# EAGLE board 24-SMD-adapter (EAGLE 6.3)
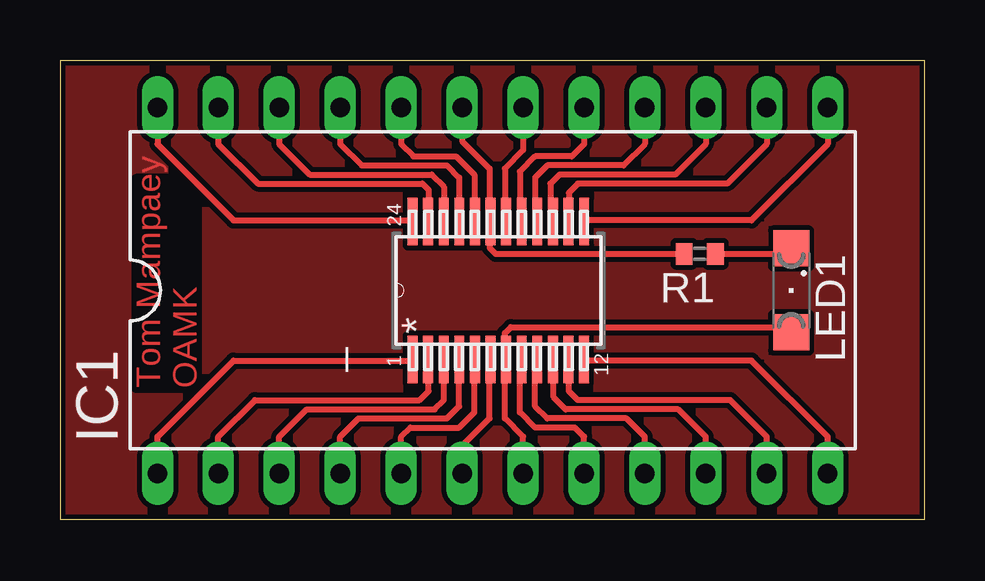
[diagram p0: board, top side]

Size 36.05 x 19.1 mm. Coordinates in mm from the lower left corner, seen from the top.
Outline: 0,0 36.05,0 36.05,19.1 0,19.1 0,0
Copper layers (1*16): Top 0.035mm / dielectric 1.5mm / Bottom 0.035mm
Design rules "default *": minimum track width 10mil, minimum drill 24mil, track to track 8mil, track to pad 8mil, pad to pad 8mil, via to via 8mil, smd to smd 8mil, copper to edge 8mil, drill to drill 8mil, minimum pad ring 10mil, minimum via ring 8mil, stop-mask expansion 4mil, vias tented up to drill 0mil, thermal gap 10mil

## Footprints (pad centres in the part's own frame; a part is rotated, then mirrored left to right if it is on the bottom)
SOT361_1_M = smd 1.981 x 0.406: 1 -2.87,3.336; 2 -2.87,2.686; 3 -2.87,2.036; 4 -2.87,1.386; 5 -2.87,0.736; 6 -2.87,0.086; 7 -2.87,-0.564; 8 -2.87,-1.214; 9 -2.87,-1.864; 10 -2.87,-2.514; 11 -2.87,-3.164; 12 -2.87,-3.814; 13 2.87,-3.816; 14 2.87,-3.166; 15 2.87,-2.514; 16 2.87,-1.864; 17 2.87,-1.214; 18 2.87,-0.564; 19 2.87,0.086; 20 2.87,0.736; 21 2.87,1.386; 22 2.87,2.036; 23 2.87,2.686; 24 2.87,3.336
DIL24-6 = drill 0.813 long: 1 -13.97,-7.62; 2 -11.43,-7.62; 3 -8.89,-7.62; 4 -6.35,-7.62; 5 -3.81,-7.62; 6 -1.27,-7.62; 7 1.27,-7.62; 8 3.81,-7.62; 9 6.35,-7.62; 10 8.89,-7.62; 11 11.43,-7.62; 12 13.97,-7.62; 13 13.97,7.62; 14 11.43,7.62; 15 8.89,7.62; 16 6.35,7.62; 17 3.81,7.62; 18 1.27,7.62; 19 -1.27,7.62; 20 -3.81,7.62; 21 -6.35,7.62; 22 -8.89,7.62; 23 -11.43,7.62; 24 -13.97,7.62
SML1206 = smd 1.5 x 1.5: A 1.75,0; C -1.75,0
R0402 = smd 0.7 x 0.9: 1 -0.65,0; 2 0.65,0

## Placement (x,y rotation side)
_  SC16IS750  [SOT361_1_M]  18.03,9.53 90 top
IC1  [DIL24-6]  18.03,9.53 0 top
LED1  [SML1206]  30.48,9.53 270 top
R1  [R0402]  26.67,11.05 180 top

## Library data of the parts
_ = SC16IS750
IC1 = ic-package
LED1 = led
R1 = resistor

## Nets
N$1: _.1 IC1.1
N$2: _.2 IC1.2
N$3: _.3 IC1.3
N$4: _.4 IC1.4
N$5: _.5 IC1.5
N$6: _.6 IC1.6
N$7: _.7 IC1.7 LED1.A
N$8: _.8 IC1.8
N$9: _.9 IC1.9
N$10: _.10 IC1.10
N$11: _.11 IC1.11
N$12: _.12 IC1.12
N$13: _.24 IC1.24
N$14: _.23 IC1.23
N$15: _.22 IC1.22
N$16: _.21 IC1.21
N$17: _.20 IC1.20
N$18: _.19 IC1.19 R1.2
N$19: _.18 IC1.18
N$20: _.17 IC1.17
N$21: _.16 IC1.16
N$22: _.15 IC1.15
N$23: _.14 IC1.14
N$24: _.13 IC1.13
N$25: LED1.C R1.1

## Tracks (layer width: path | path; a pad name or v marks a point on that pad's centre or on a via)
N$1
  Top 0.254: IC1.1 4.06,3.43 7.24,6.6 14.65,6.6 _.1
N$2
  Top 0.254: IC1.2 6.6,3.43 8.13,4.95 14.99,4.95 15.37,5.33 15.37,6.64 _.2
N$3
  Top 0.254: IC1.3 9.14,3.43 10.29,4.57 15.62,4.57 16,4.95 _.3
N$4
  Top 0.254: IC1.4 11.68,3.43 12.45,4.19 16.13,4.19 16.64,4.7 16.64,6.64 _.4
N$5
  Top 0.254: IC1.5 14.22,3.43 14.61,3.81 16.64,3.81 17.27,4.45 17.27,6.63 _.5
N$6
  Top 0.254: IC1.6 16.76,3.05 17.91,4.19 17.91,6.61 _.6
N$7
  Top 0.254: IC1.7 19.3,3.43 18.54,4.19 18.54,6.6 | 18.54,6.6 _.7 | 18.54,6.6 18.54,7.75 18.8,8 30.25,8 LED1.A
N$8
  Top 0.254: IC1.8 21.84,3.43 21.46,3.81 19.81,3.81 19.18,4.45 19.18,6.58 _.8
N$9
  Top 0.254: IC1.9 24.38,3.43 23.62,4.19 20.32,4.19 19.81,4.7 19.81,6.57 _.9
N$10
  Top 0.254: IC1.10 26.92,3.43 25.78,4.57 21.08,4.57 20.57,5.08 20.57,6.63 _.10
N$11
  Top 0.254: IC1.11 29.46,3.43 27.94,4.95 21.59,4.95 21.21,5.33 _.11
N$12
  Top 0.254: IC1.12 32,3.43 28.83,6.6 21.9,6.6 _.12
N$13
  Top 0.254: IC1.24 4.06,15.62 7.24,12.45 14.65,12.45 _.24
N$14
  Top 0.254: IC1.23 6.6,15.62 8.26,13.97 15.11,13.97 15.37,13.72 15.37,12.41 _.23
N$15
  Top 0.254: IC1.22 9.14,15.62 10.41,14.35 15.49,14.35 16,13.84 _.22
N$16
  Top 0.254: IC1.21 11.68,15.62 12.57,14.73 16.13,14.73 16.64,14.22 16.64,12.41 _.21
N$17
  Top 0.254: IC1.20 14.22,15.62 14.73,15.11 16.51,15.11 17.27,14.35 17.27,12.42 _.20
N$18
  Top 0.254: IC1.19 16.76,15.75 17.91,14.61 17.91,12.44 | 17.91,12.44 _.19 | 17.91,12.44 17.91,11.3 18.16,11.05 R1.2
N$19
  Top 0.254: IC1.18 19.3,15.37 18.54,14.61 18.54,12.45 _.18
N$20
  Top 0.254: IC1.17 21.84,15.62 21.34,15.11 19.81,15.11 19.18,14.48 19.18,12.47 _.17
N$21
  Top 0.254: IC1.16 24.38,15.62 23.5,14.73 20.32,14.73 19.81,14.22 19.81,12.48 _.16
N$22
  Top 0.254: IC1.15 26.92,15.62 25.65,14.35 20.83,14.35 20.45,13.97 20.45,12.5 _.15
N$23
  Top 0.254: IC1.14 29.46,15.62 27.81,13.97 21.59,13.97 21.21,13.59 _.14
N$24
  Top 0.254: IC1.13 32,15.62 28.83,12.45 21.9,12.45 _.13
N$25
  Top 0.254: R1.1 27.19,11.16 27.3,11.05 30.25,11.05 LED1.C
N$26
  pour Top: 0,19.05 36.07,19.05 36.07,0 0,0

## Text on the board
Top: Tom Mampaey / OAMK